# Altium PCB PCB1.PcbDoc
Units mil, origin at the board's own origin, x right, y up, seen from the top; angles counter-clockwise.
Board outline 6000 x 4000 mil, 2 copper layers (Top Layer, Bottom Layer); 12 components, 7 nets, 31 pads, 0 vias.
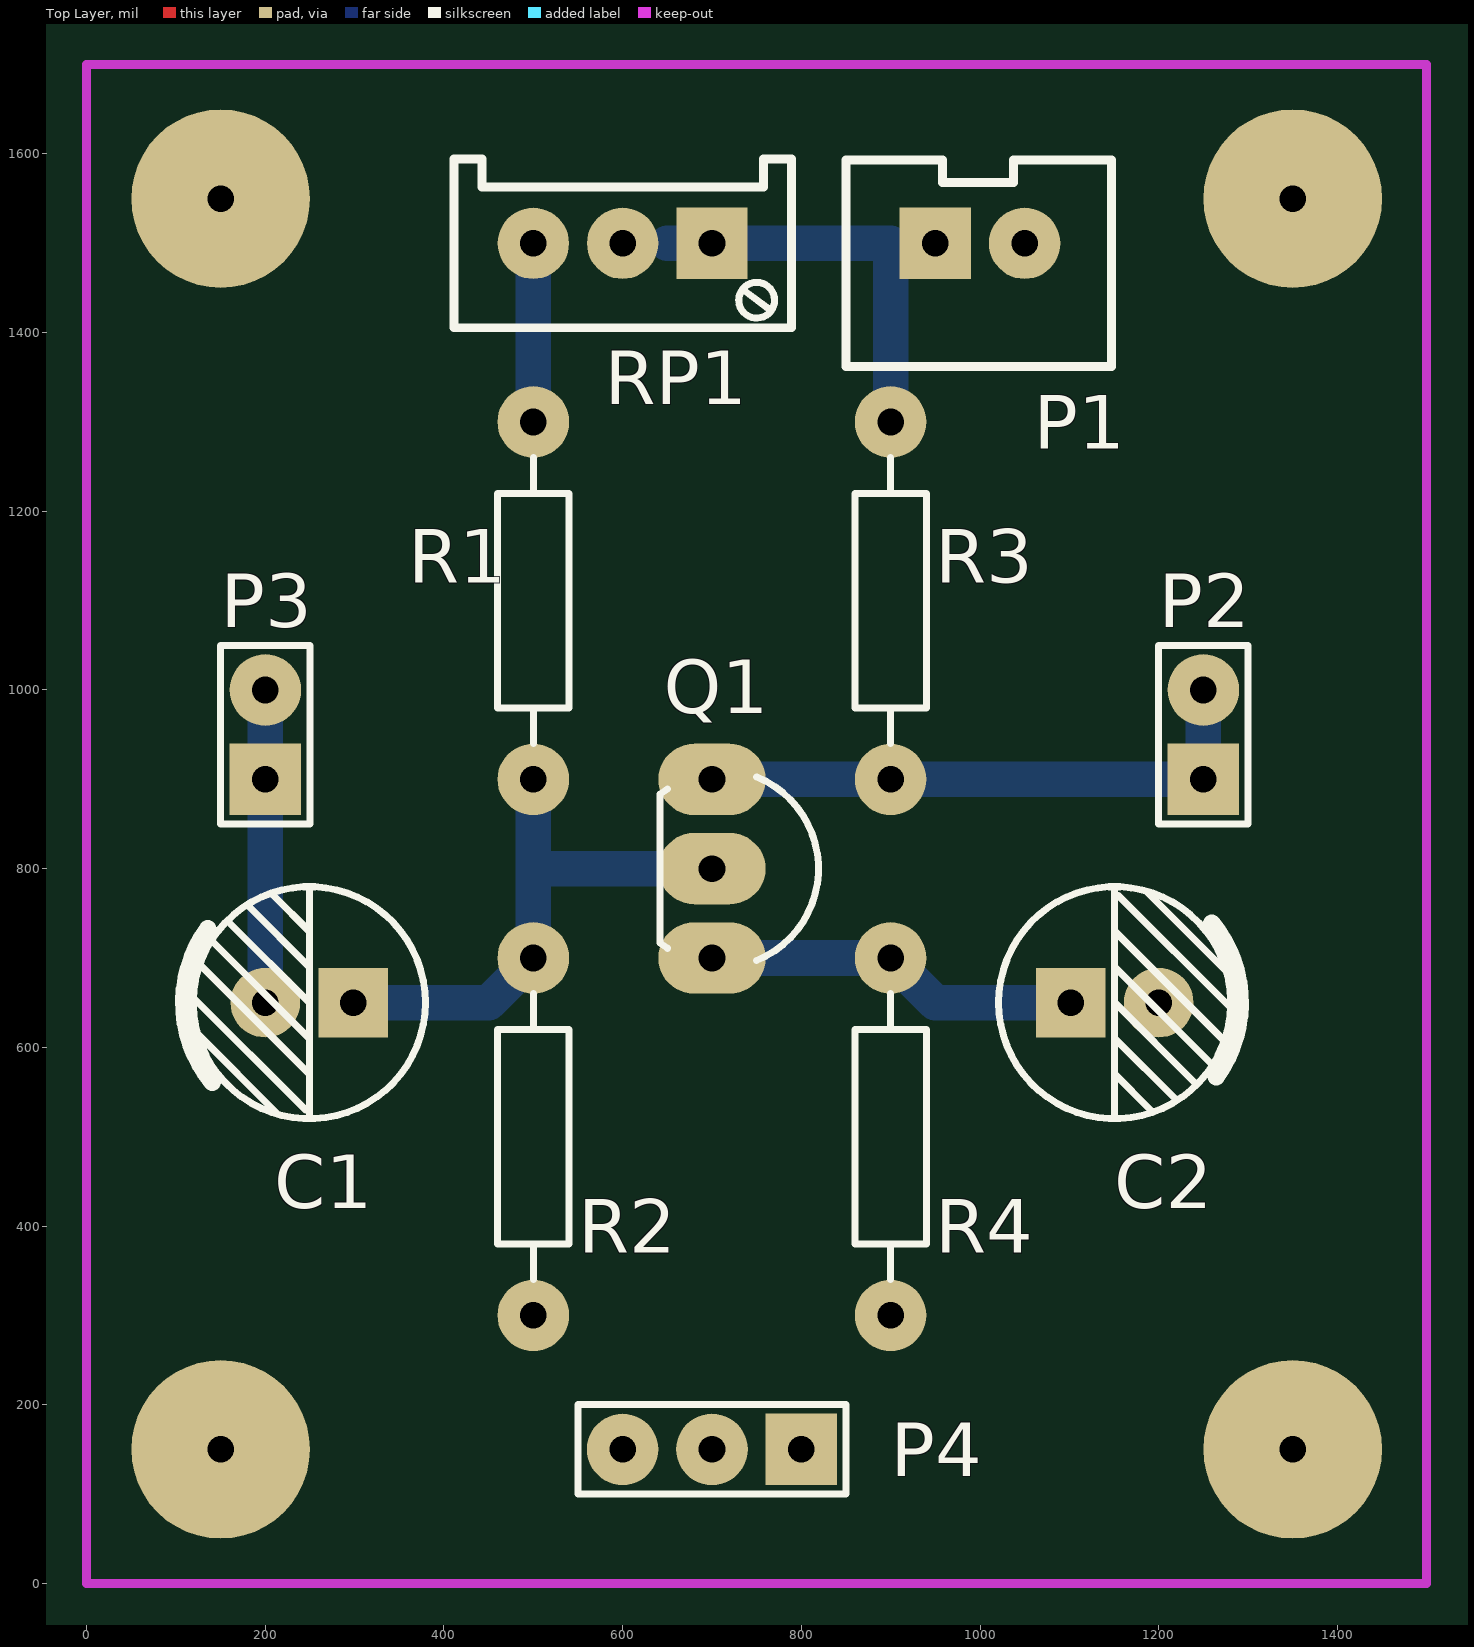
[diagram p0: Top Layer view]
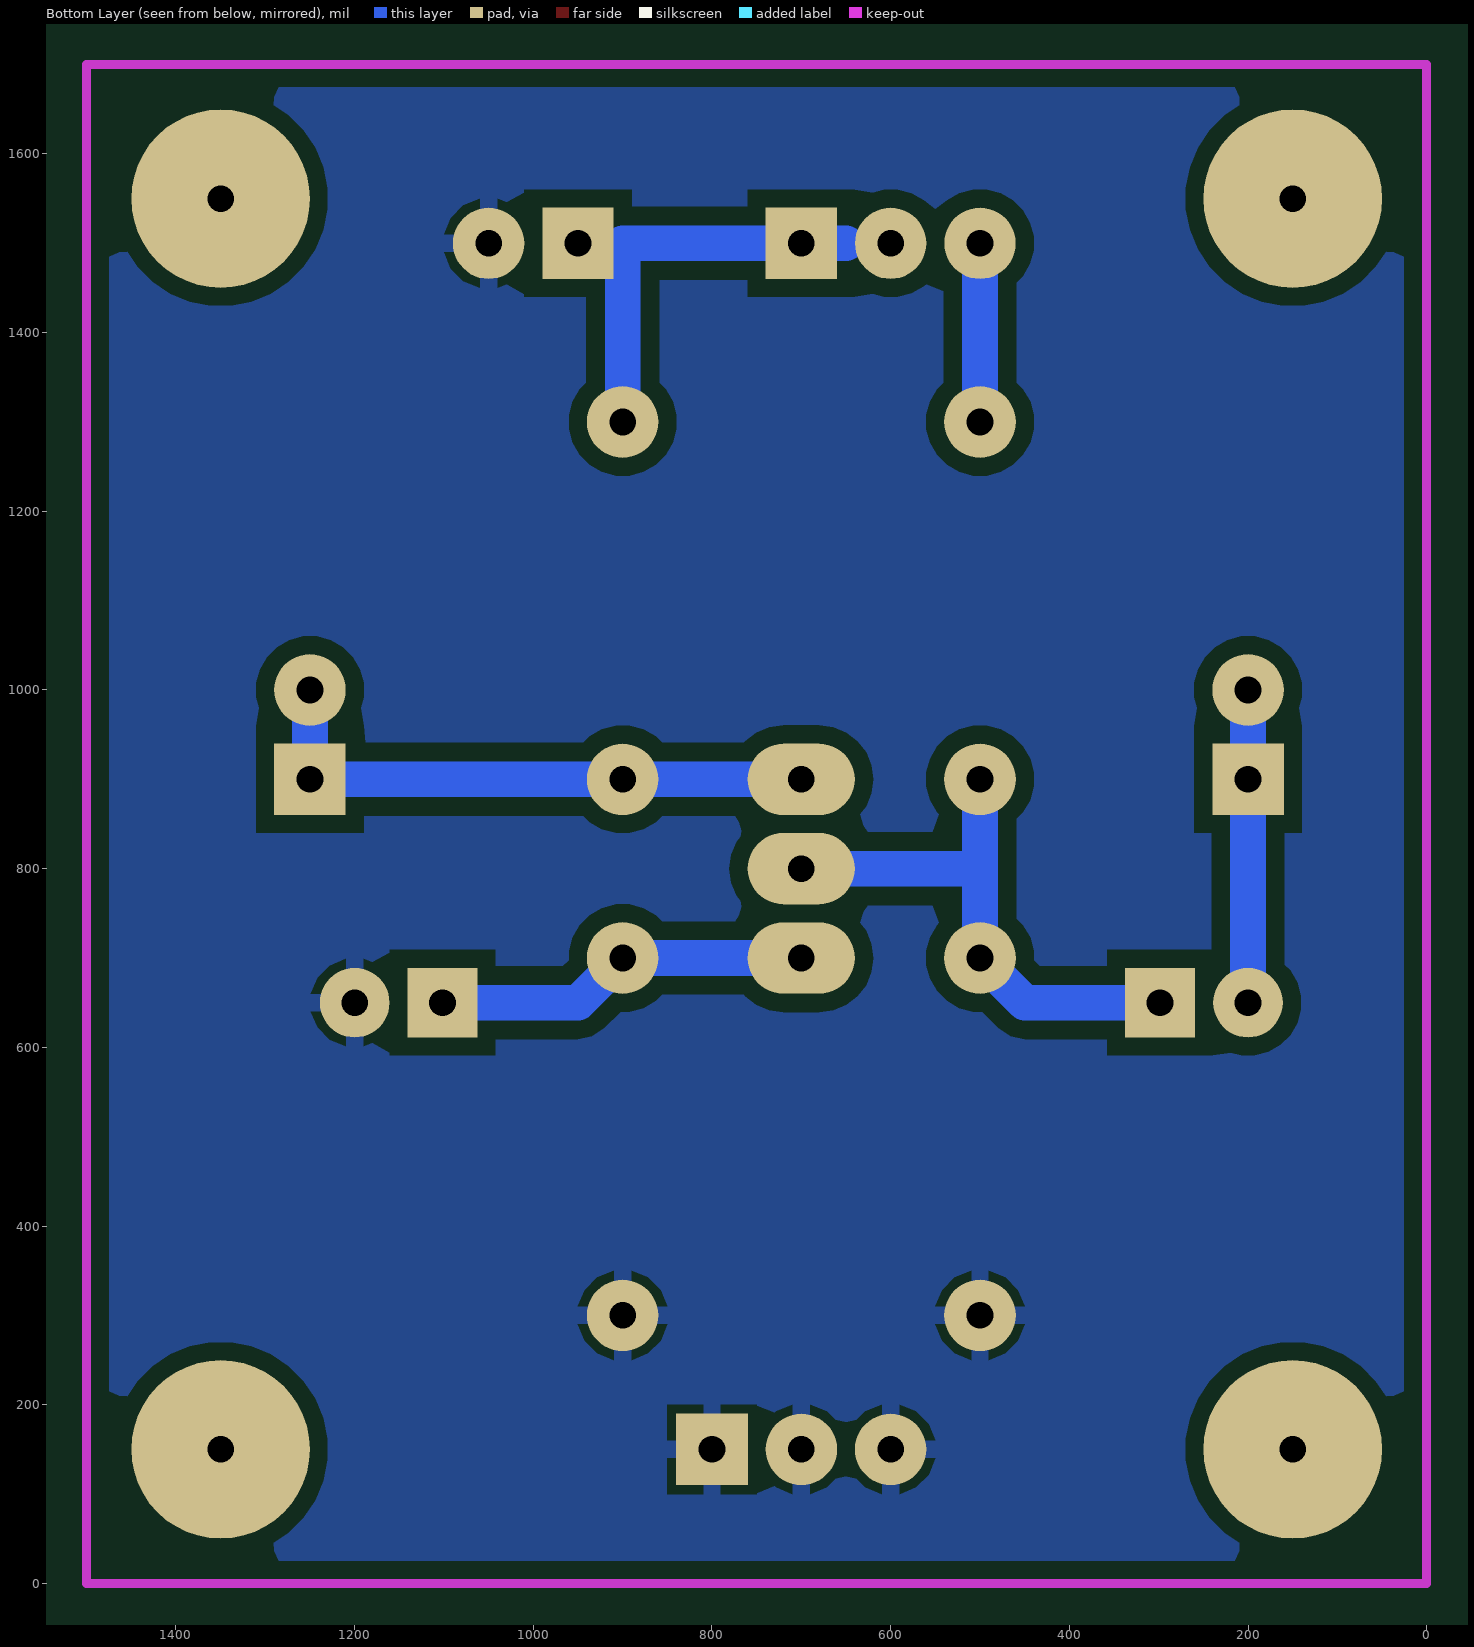
[diagram p1: Bottom Layer view, seen from below]

## Layer stack, top to bottom
Top Solder: solder mask 0.4, Solder Resist, Dk 3.5
Top Layer: signal copper 1.4
Dielectric 1: dielectric 12.6, FR-4, Dk 4.8
Bottom Layer: signal copper 1.4
Bottom Solder: solder mask 0.4, Solder Resist, Dk 3.5

## Board outline
-1700,-200 4300,-200 4300,3800 -1700,3800

## Design rules (kind name [scope] priority, off if disabled: settings)
Clearance [All] p1: gap=20 ignorepadtopadclearanceinfootprint=FALSE
PlaneConnect [All] p1: planeconnectstyle=Relief reliefexpansion=20 reliefentries=4 reliefconductorwidth=20 reliefairgap=10
PolygonConnect [All] p1: connectstyle=Relief reliefconductorwidth=20 reliefentries=4 polygonreliefangle="90 Angle" airgapwidth=10
RoutingLayers [All] p1: top layer_v5=FALSE bottom layer_v5=TRUE
RoutingVias [All] p1: holewidth=28 width=50 viastyle="Through Hole" minholewidth=28 minwidth=50 maxholewidth=28 maxwidth=50
SolderMaskExpansion [All] p1: expansion=4 istentingtop=FALSE
Width [All] p1: maxlimit=60 minlimit=10 preferedwidth=40
28 further rules are at their usual default settings.

## Components (designator, comment, footprint, x,y, rotation, side; value= is the part's Value field where it differs from the comment)
C1 "Cap Pol1" "CAP 2.5*6.3*11.2" 249.21,650 r180 top value=4.7uF
C2 "Cap Pol1" "CAP 2.5*6.3*11.2" 1150.79,650 r0 top value=4.7uF
P1 "Header 2" XH2.54-LI-2P 1000,1500 r0 top
P2 "Header 2" HDR1X2 1250,900 r90 top
P3 "Header 2" HDR1X2 200,900 r90 top
P4 "Header 3" HDR1X3 800,150 r180 top
Q1 "NPN" TO92 700,800 r270 top
R1 "Res2" AXIAL-0.4 500,1100 r90 top value=15k
R2 "Res2" AXIAL-0.4 500,500 r90 top value=15k
R3 "Res2" AXIAL-0.4 900,1100 r90 top value=10k
R4 "Res2" AXIAL-0.4 900,500 r90 top value=3.3k
RP1 "50k" 3296W 600,1500 r180 top

## Footprints (in the part's own frame and the unit in brackets; to place one, negate y for a bottom-side part, rotate by r counter-clockwise, add the part's x,y. Pads: shape width x height; smd on the part's side, far side on the other; paste and mask are expansions set on the pad)
3296W [mil] "Precise Multi-Winding Adjustable Resistor"
  rect 79.87x79.87 hole 30: 1(-100,0)
  round 79.87 hole 30: 2(0,0) 3(100,0)
  silkscreen extent -189,-94 189,94, body extent -187,-94 187,94, height 454
AXIAL-0.4 [mm] "Axial Device, Thru-Hole; 2 Leads; 0.4 in Pin Spacing"
  round 2.035 hole 0.762: 1(-5.08,0) 2(5.08,0)
  silkscreen extent -4.06,-1.02 4.06,1.02
"CAP 2.5*6.3*11.2" [mil] "脚距2.5mm直径6.3mm高度11.2mm"
  rect 78x78 hole 30: 1(-49.21,0)
  round 78 hole 30: 2(49.21,0)
  silkscreen extent -130,-130 140,130, body extent -124,-124 124,124, height 442
HDR1X2 [mil] "Connector; Header; 2 Position"
  rect 80.06x80.06 hole 30: 1(0,0)
  round 80.06 hole 30: 2(100,0)
  silkscreen extent -50,-50 150,50
HDR1X3 [mil] "Connector; Header; 3 Position"
  rect 80.06x80.06 hole 30: 1(0,0)
  round 80.06 hole 30: 2(100,0) 3(200,0)
  silkscreen extent -50,-50 250,50
TO92 [mil]
  oval 80x120 hole 30: 1(-100,0) 2(0,0) 3(100,0)
  silkscreen extent -103,-58 103,119
XH2.54-LI-2P [mil] "接插件，2P"
  rect 80x80 hole 30: 1(-50,0)
  round 80 hole 30: 2(50,0)
  silkscreen extent -150,-138 147,93, body extent -148,-130 148,94, height 278

## Part data
C1 C2: library part "Cap Pol2", "Polarized Capacitor (Axial)", LatestRevisionDate=17-Jul-2002, LatestRevisionNote="Re-released for DXP Platform.", PackageDescription="Polarized Capacitor; 2 Leads", PackageReference=POLAR0.8, Published=8-Jun-2000, Publisher="Altium Limited"
P1 P2 P3: "Header, 2-Pin", LatestRevisionDate=17-Jul-2002, LatestRevisionNote="Re-released for DXP Platform.", Publisher="Altium Limited"
P4: "Header, 3-Pin", LatestRevisionDate=17-Jul-2002, LatestRevisionNote="Re-released for DXP Platform.", Publisher="Altium Limited"
Q1: "NPN Bipolar Transistor", Code_JEDEC=TO-226-AA, LatestRevisionDate=17-Jul-2002, LatestRevisionNote="Re-released for DXP Platform.", PackageDescription="TO, Flat Index; 3 In-Line, Axial Leads; Body Dia. 4.8mm; Leads 0.55 x 0.51 mm (max)", PackageReference=TO-226-AA, Published=8-Jun-2000, Publisher="Altium Limited"
R1 R2 R3 R4: "Resistor", LatestRevisionDate=17-Jul-2002, LatestRevisionNote="Re-released for DXP Platform.", PackageDescription="Axial Device, Thru-Hole; 2 Leads; 0.4 in Pin Spacing", PackageReference=AXIAL-0.4, Published=8-Jun-2000, Publisher="Altium Limited"
RP1: library part RP-ID, "插件单联电位器", BOM名称=插件电位器, 学习资源=www.ooocke.com, 版权归属=源创客

## Free pads (board coordinates)
  round 200 hole 30: 1(1350,1550) 2(1350,150) 3(150,150) 4(150,1550)

## Nets (pads, with @x,y where several pads share a name; then routed paths per layer and width w, separated by ;. In a path a pad name is that pad's centre, name@x,y a point inside that pad or via, vN(x,y) a via of type N, cw(c..) or ccw(c..) an arc to the next point about the centre after c; other vN are vias at no path point)
+12: P1.1 R3.2 RP1.1 RP1.2 | length 450
  Bottom Layer w40: 650,1500 RP1.1 900,1500 R3.2
GND: C2.2 P1.2 P4.1 P4.2 P4.3 R2.1 R4.1
NetC1_1: C1.1 Q1.2 R1.1 R2.2 | length 620.7
  Bottom Layer w40: C1.1@300,650 450,650 R2.2 500,800 ; R1.1 500,800 ; Q1.2 500,800
NetC1_2: C1.2 P3.1 P3.2 | length 350
  Bottom Layer w40: C1.2 P3.1 P3.2
NetC2_1: C2.1 Q1.3 R4.2 | length 420.7
  Bottom Layer w40: Q1.3 R4.2 950,650 C2.1@1100,650
NetP2_1: P2.1 P2.2 Q1.1 R3.1 | length 650
  Bottom Layer w40: Q1.1 R3.1 P2.1 P2.2
NetR1_2: R1.2 RP1.3 | length 200
  Bottom Layer w40: R1.2 RP1.3

## Polygon pours and split planes (outlines as drawn)
GND on Bottom Layer "GND_L02_P000" (solid, remove dead copper, pour order 0): 0,1700 1500,1700 1500,0 0,0

## Keep-outs
Keep-Out Layer:
  lines w10: 0,0 0,1700 1500,1700 1500,1275 1500,425 1500,0 0,0